# Altium PCB bob_breakout-layout.PcbDoc (part 2 of 2)
Units mil, origin at the board's own origin, x right, y up, seen from the top; angles counter-clockwise.
Board outline 5510 x 3935 mil, 2 copper layers (Top Layer, Bottom Layer); 95 components, 85 nets, 372 pads, 74 vias.
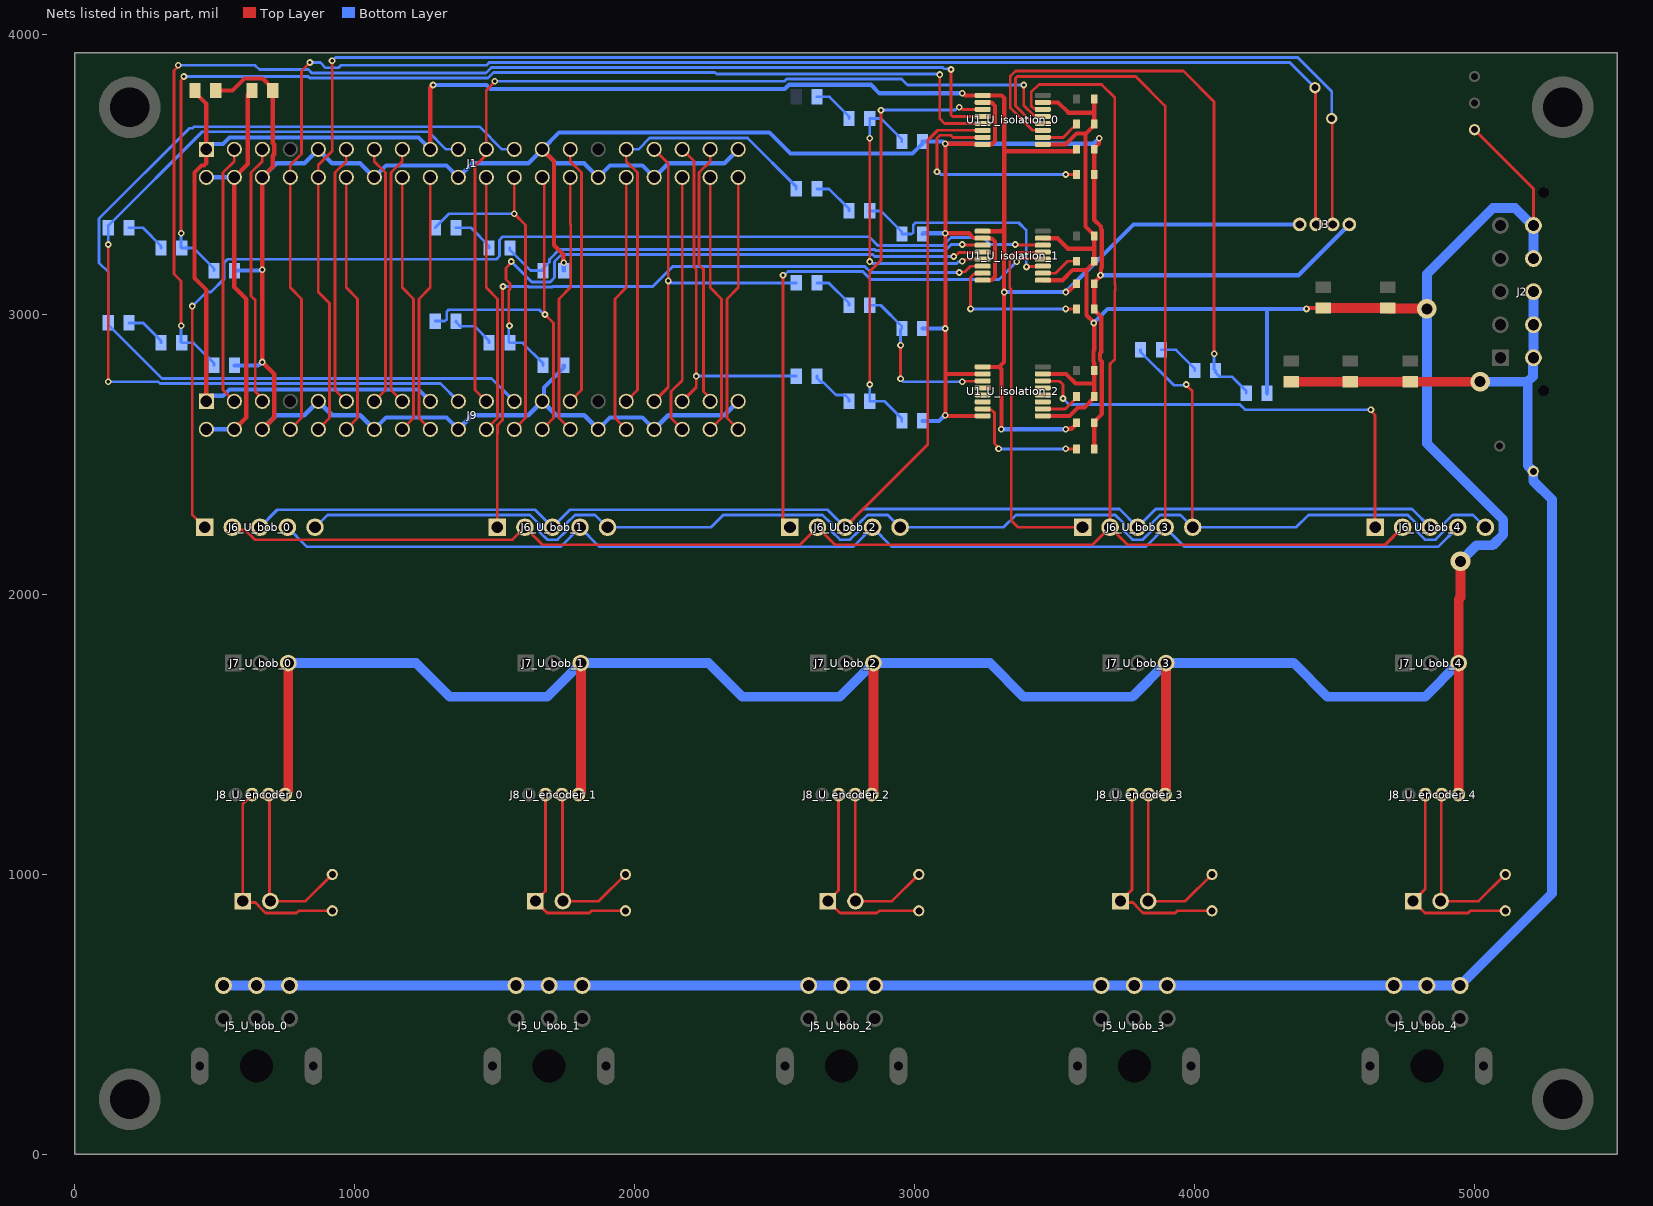
[diagram p2: the nets of this part, all layers, seen from the top]

## Via types
v1: diameter 24, hole 12, Top Layer to Bottom Layer, 70 vias
v2: diameter 70, hole 39.37, Top Layer to Bottom Layer, 4 vias

## Nets (pads, with @x,y where several pads share a name; then routed paths per layer and width w, separated by ;. In a path a pad name is that pad's centre, name@x,y a point inside that pad or via, vN(x,y) a via of type N, cw(c..) or ccw(c..) an arc to the next point about the centre after c; other vN are vias at no path point) (continued)
GND: C3.2 C4.2 C9_U_isolation_0.1 C9_U_isolation_1.1 C9_U_isolation_2.1 GND.1 J2.9 J2.10 J7_U_bob_0.3 J7_U_bob_1.3 J7_U_bob_2.3 J7_U_bob_3.3 J7_U_bob_4.3 J8_U_encoder_0.4 J8_U_encoder_1.4 J8_U_encoder_2.4 J8_U_encoder_3.4 J8_U_encoder_4.4 R2_U_isolation_0.2 R2_U_isolation_1.2 R2_U_isolation_2.2 R14_U_low-pass-filter_3.2 U1_U_isolation_0.9 U1_U_isolation_0.15 U1_U_isolation_1.9 U1_U_isolation_1.15 U1_U_isolation_2.9 U1_U_isolation_2.15 | length 13375.3
  Top Layer w10: GND.1@5000,3660 5210.63,3449.37 J2.10@5210.63,3317.96
  Top Layer w15: U1_U_isolation_2.9@3457.91,2637.5 3553.19,2637.5 3583.65,2667.96 3606.73,2667.96 3641.5,2702.73 R2_U_isolation_2.2@3641.5,2706.67 3641.5,2753.33 ; U1_U_isolation_2.15@3457.91,2787.5 3541.52,2787.5 3575.69,2753.33 3641.5,2753.33 ; U1_U_isolation_1.9@3457.91,3122.5 3528.45,3122.5 3564.7,3158.75 3614.18,3158.75 ; U1_U_isolation_1.15@3457.91,3272.5 3509.98,3272.5 3547.48,3235 3641.5,3235 ; U1_U_isolation_0.9@3457.91,3607.5 3539.07,3607.5 3577.92,3646.35 3609.28,3646.35 3610.53,3645.1 ; U1_U_isolation_0.15@3457.91,3757.5 3512.48,3757.5 3549.1,3720.88 3641.5,3720.88 ; v1@3640.5,2970.84 3614.18,2997.16 3614.18,3158.75 ; v1@3641.5,2969.84 3641.5,2872.91 3639.5,2870.92 3639.5,2829.08 3641.5,2827.09 C9_U_isolation_2.1@3641.5,2800 3641.5,2753.33 ; C9_U_isolation_0.1@3641.5,3770 3641.5,3720.88 ; v1(4400,3020) 4403,3023 C3.2@4460,3023 ; 3610.53,3645.1 3610.53,3314.9 3641.5,3283.94 3641.5,3235 ; 3610.53,3645.1 3637.18,3671.75 3637.18,3675.69 R2_U_isolation_0.2@3641.5,3680 3641.5,3720.88 ; 3614.18,3158.75 3641.5,3186.06 R2_U_isolation_1.2@3641.5,3190 3641.5,3235
  Top Layer w35: J8_U_encoder_0.4@751.53,1285 762.8,1296.26 J7_U_bob_0.3@762.8,1755 ; J8_U_encoder_1.4@1799.19,1285 1807.95,1293.76 J7_U_bob_1.3@1807.95,1755 ; J8_U_encoder_2.4@2846.85,1285 2853.11,1291.26 J7_U_bob_2.3@2853.11,1755 ; J8_U_encoder_3.4@3894.51,1285 3898.27,1288.76 J7_U_bob_3.3@3898.27,1755 ; C3.2@4460,3023 C4.2@4690,3023 4691.5,3021.5 4828.5,3021.5 v2(4830,3020) ; J8_U_encoder_4.4@4942.17,1285 4943.43,1286.26 J7_U_bob_4.3@4943.43,1755 4943.43,1983 4950,1989.57 v2(4950,2118)
  Bottom Layer w15: v1(3639.5,2969.84) 3689.66,3020 4258.5,3020 ; R14_U_low-pass-filter_3.2@4258.5,2718.88 4258.5,3020 ; v1(4400,3020) 4258.5,3020
  Bottom Layer w35: J7_U_bob_0.3@762.8,1755 1219.07,1755 1339.75,1634.31 1687.27,1634.31 J7_U_bob_1.3@1807.95,1755 2264.23,1755 2384.91,1634.31 2732.42,1634.31 J7_U_bob_2.3@2853.11,1755 3268.87,1755 3389.55,1634.31 3777.58,1634.31 J7_U_bob_3.3@3898.27,1755 4354.54,1755 4475.23,1634.31 4822.74,1634.31 J7_U_bob_4.3@4943.43,1755 ; v2(4950,2118) 5007.7,2175.7 5065.33,2175.7 5103,2213.37 5103,2266.63 4830,2539.63 v2(4830,3020) 4830,3144.42 5066.46,3380.88 5145.05,3380.88 5207.97,3317.96 J2.10@5210.63,3317.96 J2.9@5210.63,3199.85
GPIO_PE6: J1.33 J9.33 R12_U_low-pass-filter_8.2 | length 1401.8
  Top Layer w10: J9.33@2070,2690 2120,2740 v1(2120,3120) 2120,3540 J1.33@2070,3590
  Bottom Layer w10: v1(2120,3120) 2123.79,3120 2130.79,3113 R12_U_low-pass-filter_8.2@2577.5,3113
GPIO_PZ0: J1.31 J9.31 R12_U_low-pass-filter_7.2 | length 1636.6
  Top Layer w10: J9.31@1970,2690 2009.97,2729.97 2009.97,3506.56 1970,3546.52 J1.31@1970,3590
  Bottom Layer w10: J1.31@1970,3590 2013.48,3590 2053.44,3629.97 2403.78,3629.97 2577.5,3456.25 R12_U_low-pass-filter_7.2@2577.5,3448.75
I2C_1_SCL: J1.28 J9.28 | length 934.8
  Top Layer w10: J9.28@1770,2590 1730.03,2629.97 1730.03,3055.79 1772,3097.76 1772,3321.17 1770,3323.17 J1.28@1770,3490
I2C_1_SDA: J1.27 J9.27 | length 933.1
  Top Layer w10: J9.27@1770,2690 1809.97,2729.97 1809.97,3506.56 1770,3546.52 J1.27@1770,3590
I2C_2_SCL: J1.05 J9.05 | length 933.1
  Top Layer w10: J9.05@670,2690 670,2699.35 645,2724.35 645,3051.16 630.03,3066.13 630.03,3506.56 670,3546.52 J1.05@670,3590
I2C_2_SDA: J1.03 J9.03 | length 933.1
  Top Layer w10: J9.03@570,2690 530.03,2729.97 530.03,3506.56 570,3546.52 J1.03@570,3590
I2S_4_LRCK: J1.35 J9.35 R12_U_low-pass-filter_0.2 | length 1298.9
  Top Layer w10: J9.35@2170,2690 2220,2740 2220,3161.89 2212.03,3169.86 2212.03,3547.97 J1.35@2170,3590
  Bottom Layer w10: v1(2220,2780) R12_U_low-pass-filter_0.2@2577.5,2780
I2S_4_SCLK: J1.12 J9.12 | length 933.1
  Top Layer w10: J9.12@970,2590 1009.97,2629.97 1009.97,3055.79 970,3095.76 J1.12@970,3490
I2S_4_SDIN: J1.38 J9.38 | length 933.1
  Top Layer w10: J9.38@2270,2590 2309.97,2629.97 2309.97,3055.79 2270,3095.76 J1.38@2270,3490
I2S_4_SDOUT: J1.40 J9.40 | length 933.1
  Top Layer w10: J9.40@2370,2590 2330.03,2629.97 2330.03,3055.79 2370,3095.76 J1.40@2370,3490
JETSON_3V3: C2.1 C8_U_isolation_0.2 C8_U_isolation_1.2 C8_U_isolation_2.2 J1.01 J1.17 J3.1 J9.01 J9.17 U1_U_isolation_0.1 U1_U_isolation_1.1 U1_U_isolation_2.1 | length 8227
  Top Layer w15: C2.1@430,3800 430,3792.5 470,3752.5 J1.01@470,3590 470,3541.26 461.21,3532.47 452.41,3532.47 427.53,3507.59 427.53,3129.76 470,3087.3 J9.01@470,2690 ; J1.17@1270,3590 1270,3810 v1(1280,3820) ; v1(3170,3790) 3172.44,3790 3179.94,3782.5 U1_U_isolation_0.1@3243.35,3782.5 3311.21,3782.5 3320,3773.71 3320,3584.76 ; U1_U_isolation_2.1@3243.35,2812.5 3301.6,2812.5 ; U1_U_isolation_1.1@3243.35,3297.5 3311.21,3297.5 3320,3306.29 ; v1(3310,2590) 3310,2804.1 3301.6,2812.5 ; v1(3540,2590) 3541.72,2591.72 3560.83,2591.72 3578.5,2609.4 C8_U_isolation_2.2@3578.5,2613.33 ; v1(3540,3080) 3548.5,3080 C8_U_isolation_1.2@3578.5,3110 ; C8_U_isolation_0.2@3578.5,3590 3578.5,3587.45 3574.19,3583.14 3321.62,3583.14 3320,3584.76 ; 3301.6,2812.5 3319.5,2830.4 3319.5,3207.86 3320,3208.36 3320,3306.29 ; 3320,3306.29 3320,3584.76
  Bottom Layer w15: J9.01@470,2690 489.47,2709.47 529.41,2709.47 552.41,2732.47 1227.53,2732.47 J9.17@1270,2690 ; J1.01@470,3590 489.47,3609.47 529.41,3609.47 552.41,3632.47 1227.53,3632.47 J1.17@1270,3590 ; v1(1280,3820) 1471.11,3820 1485.5,3805.61 2536.19,3805.61 2551.08,3820.5 2844.07,3820.5 2874.57,3790 v1(3170,3790) ; v1(3310,2590) v1(3540,2590) ; v1(3320,3080) v1(3540,3080) 3781.74,3321.74 J3.1@4375.63,3321.74
JETSON_5V: C1.1 J1.02 J1.04 J9.02 J9.04 | length 1471.3
  Top Layer w15: J9.04@570,2590 612.47,2632.47 612.47,3054.7 570,3097.17 J1.04@570,3490 618,3538 618,3785 C1.1@633,3800
  Bottom Layer w15: J9.02@470,2590 J9.04@570,2590 ; J1.02@470,3490 J1.04@570,3490
JETSON_GND: C1.2 C2.2 C8_U_isolation_0.1 C8_U_isolation_1.1 C8_U_isolation_2.1 J1.06 J1.09 J1.14 J1.20 J1.25 J1.30 J1.34 J1.39 J3.4 J9.06 J9.09 J9.14 J9.20 J9.25 J9.30 J9.34 J9.39 R1_U_isolation_0.2 R1_U_isolation_1.2 R1_U_isolation_2.2 R14_U_low-pass-filter_0.2 R14_U_low-pass-filter_1.2 R14_U_low-pass-filter_2.2 R14_U_low-pass-filter_4.2 R14_U_low-pass-filter_5.2 R14_U_low-pass-filter_6.2 R14_U_low-pass-filter_7.2 R14_U_low-pass-filter_8.2 U1_U_isolation_0.2 U1_U_isolation_0.8 U1_U_isolation_1.2 U1_U_isolation_1.8 U1_U_isolation_2.2 U1_U_isolation_2.8 | length 12717.3
  Top Layer w15: C2.2@504,3800 563.58,3800 606.58,3843 671.5,3843 707,3807.5 C1.2@707,3800 707,3613.06 712.47,3607.59 712.47,3572.41 707,3566.94 707,3527 J1.06@670,3490 v1(670,3160) v1(670,2830) 712.47,2787.53 712.47,2632.47 J9.06@670,2590 ; J1.25@1670,3590 1712.47,3547.53 1712.47,3247.53 1745.28,3214.72 1745.28,3186.72 v1(1747,3185) ; 3110,2790 3112.5,2787.5 U1_U_isolation_2.2@3243.35,2787.5 ; U1_U_isolation_2.8@3243.35,2637.5 3114.94,2637.5 3112.44,2640 v1(3110,2640) v1(3110,2950) v1(3110,3290) ; U1_U_isolation_1.8@3243.35,3122.5 3243.99,3123.14 3275.72,3123.14 3287.39,3134.82 3287.39,3260.18 3275.72,3271.86 3243.99,3271.86 U1_U_isolation_1.2@3243.35,3272.5 3242.71,3273.14 3210.98,3273.14 3194.12,3290 v1(3110,3290) ; U1_U_isolation_0.2@3243.35,3757.5 3243.99,3756.86 3275.72,3756.86 3287.39,3745.18 3287.39,3619.82 3275.72,3608.14 3210.98,3608.14 3209.12,3610 v1(3110,3610) v1(3110,3290) ; R1_U_isolation_2.2@3641.5,2520 C8_U_isolation_2.1@3641.5,2613.33 3645.81,2617.64 3645.81,2621.58 3668.81,2644.58 3668.81,2832.3 3662.5,2838.61 3662.5,2861.39 3667,2865.89 3667,2990.56 3645.81,3011.75 3645.81,3015.69 R1_U_isolation_1.2@3641.5,3020 3641.5,3113.94 3662.59,3135.03 3662.59,3138.28 3666.03,3141.72 3666.03,3165.05 3668.81,3167.83 3668.81,3302.17 3666.03,3304.95 3666.03,3313.97 3641.5,3338.5 R1_U_isolation_0.2@3641.5,3500 C8_U_isolation_0.1@3641.5,3590 3641.5,3593.94 3658.28,3610.72 3658.28,3628.28 v1(3660,3630)
  Bottom Layer w15: R14_U_low-pass-filter_1.2@571,2818.12 655.69,2818.12 667.56,2830 v1(670,2830) ; R14_U_low-pass-filter_2.2@571,3156.75 666.75,3156.75 v1(670,3160) ; J9.06@670,2590 720,2640 820,2640 J9.09@870,2690 920,2640 1020,2640 J9.14@1070,2590 1112.47,2632.47 1327.53,2632.47 J9.20@1370,2590 1420,2640 1620,2640 J9.25@1670,2690 ; J1.06@670,3490 720,3540 820,3540 J1.09@870,3590 920,3540 1020,3540 J1.14@1070,3490 1112.47,3532.47 1327.53,3532.47 J1.20@1370,3490 1420,3540 1620,3540 J1.25@1670,3590 ; R14_U_low-pass-filter_5.2@1747,2818.12 1747,2810.62 1675.84,2739.47 1675.84,2695.84 J9.25@1670,2690 ; R14_U_low-pass-filter_4.2@1747,3156.75 v1(1747,3185) ; J9.39@2370,2690 2320,2640 2120,2640 J9.34@2070,2590 2027.53,2632.47 1912.47,2632.47 J9.30@1870,2590 1820,2640 1720,2640 J9.25@1670,2690 ; J1.39@2370,3590 2320,3540 2120,3540 J1.34@2070,3490 2027.53,3532.47 1912.47,3532.47 J1.30@1870,3490 1820,3540 1720,3540 J1.25@1670,3590 ; R14_U_low-pass-filter_0.2@3028.5,2620 3087.56,2620 3107.56,2640 v1(3110,2640) ; R14_U_low-pass-filter_8.2@3028.5,2950 v1(3110,2950) ; R14_U_low-pass-filter_7.2@3028.5,3287.38 3031.12,3290 v1(3110,3290) ; v1(3660,3630) 3640,3610 v1(3110,3610) 3107.56,3610 3099.81,3617.75 R14_U_low-pass-filter_6.2@3028.5,3617.75 3028.5,3610.25 2993,3574.75 2556.84,3574.75 2481.12,3650.47 1730.47,3650.47 J1.25@1670,3590 ; v1(3664.31,3140) 4371.06,3140 J3.4@4552.8,3321.74
LCD_BL_PWM: J1.32 J9.32 | length 933.1
  Top Layer w10: J9.32@1970,2590 1930.03,2629.97 1930.03,3055.79 1970,3095.76 J1.32@1970,3490
LCD_TE: J1.15 J9.15 | length 933.1
  Top Layer w10: J9.15@1170,2690 1130.03,2729.97 1130.03,3506.56 1170,3546.52 J1.15@1170,3590
NetENC_A_U_encoder_0_1: ENC_A_U_encoder_0.1 J4_U_bob_0.1 J8_U_encoder_0.2 | length 736.8
  Top Layer w10: J8_U_encoder_0.2@633.42,1285 600.16,1251.73 J4_U_bob_0.1@600.16,904.33 604.49,900 644.84,900 655.9,888.95 655.9,886.65 680.9,861.64 792.21,861.64 800.57,870 ENC_A_U_encoder_0.1@920,870
NetENC_A_U_encoder_1_1: ENC_A_U_encoder_1.1 J4_U_bob_1.1 J8_U_encoder_1.2 | length 738.8
  Top Layer w10: J8_U_encoder_1.2@1681.08,1285 1681.08,940.1 J4_U_bob_1.1@1645.31,904.33 1688,861.64 1838.54,861.64 1846.9,870 ENC_A_U_encoder_1.1@1967.5,870
NetENC_A_U_encoder_2_1: ENC_A_U_encoder_2.1 J4_U_bob_2.1 J8_U_encoder_2.2 | length 742.2
  Top Layer w10: J8_U_encoder_2.2@2728.74,1285 2728.74,942.6 J4_U_bob_2.1@2690.47,904.33 2733.16,861.64 2865.84,861.64 2874.2,870 ENC_A_U_encoder_2.1@3015,870
NetENC_A_U_encoder_3_1: ENC_A_U_encoder_3.1 J4_U_bob_3.1 J8_U_encoder_3.2 | length 746.9
  Top Layer w10: J8_U_encoder_3.2@3776.4,1285 3776.4,945.1 J4_U_bob_3.1@3735.63,904.33 3739.96,900 3780.32,900 3791.37,888.95 3791.37,886.65 3816.37,861.64 3931.2,861.64 3939.56,870 ENC_A_U_encoder_3.1@4062.5,870
NetENC_A_U_encoder_4_1: ENC_A_U_encoder_4.1 J4_U_bob_4.1 J8_U_encoder_4.2 | length 748.9
  Top Layer w10: J8_U_encoder_4.2@4824.06,1285 4824.06,947.6 J4_U_bob_4.1@4780.79,904.33 4823.47,861.64 4977.53,861.64 4985.88,870 ENC_A_U_encoder_4.1@5110,870
NetENC_B_U_encoder_0_1: ENC_B_U_encoder_0.1 J4_U_bob_0.2 J8_U_encoder_0.3 | length 644.2
  Top Layer w10: J8_U_encoder_0.3@692.48,1285 695.53,1281.95 695.53,907.38 J4_U_bob_0.2@698.58,904.33 824.33,904.33 ENC_B_U_encoder_0.1@920,1000
NetENC_B_U_encoder_1_1: ENC_B_U_encoder_1.1 J4_U_bob_1.2 J8_U_encoder_1.3 | length 645.5
  Top Layer w10: J8_U_encoder_1.3@1740.14,1285 1741.94,1283.2 1741.94,906.13 J4_U_bob_1.2@1743.74,904.33 1871.83,904.33 ENC_B_U_encoder_1.1@1967.5,1000
NetENC_B_U_encoder_2_1: ENC_B_U_encoder_2.1 J4_U_bob_2.2 J8_U_encoder_2.3 | length 646.9
  Top Layer w10: J8_U_encoder_2.3@2787.8,1285 2788.35,1284.45 2788.35,904.88 J4_U_bob_2.2@2788.9,904.33 2919.33,904.33 ENC_B_U_encoder_2.1@3015,1000
NetENC_B_U_encoder_3_1: ENC_B_U_encoder_3.1 J4_U_bob_3.2 J8_U_encoder_3.3 | length 649.3
  Top Layer w10: J8_U_encoder_3.3@3835.45,1285 3834.75,1284.3 3834.75,905.03 J4_U_bob_3.2@3834.05,904.33 3966.83,904.33 ENC_B_U_encoder_3.1@4062.5,1000
NetENC_B_U_encoder_4_1: ENC_B_U_encoder_4.1 J4_U_bob_4.2 J8_U_encoder_4.3 | length 652.7
  Top Layer w10: J8_U_encoder_4.3@4883.11,1285 4881.16,1283.05 4881.16,906.28 J4_U_bob_4.2@4879.21,904.33 5014.33,904.33 ENC_B_U_encoder_4.1@5110,1000
NetR1_U_isolation_0_1: R1_U_isolation_0.1 U1_U_isolation_0.7 | length 793.2
  Top Layer w10: v1(3080,3510) 3080,3630 3090,3640 3130,3640 3137.5,3632.5 U1_U_isolation_0.7@3243.35,3632.5 ; v1(3540,3500) R1_U_isolation_0.1@3578.5,3500
  Bottom Layer w10: v1(3080,3510) 3083.79,3510 3093.79,3500 v1(3540,3500)
NetR1_U_isolation_1_1: R1_U_isolation_1.1 U1_U_isolation_1.7 | length 540.5
  Top Layer w10: v1(3200,3020) 3200,3132.34 3212.01,3144.36 3240.21,3144.36 U1_U_isolation_1.7@3243.35,3147.5 ; v1(3540,3020) R1_U_isolation_1.1@3578.5,3020
  Bottom Layer w10: v1(3200,3020) v1(3540,3020)
NetR1_U_isolation_2_1: R1_U_isolation_2.1 U1_U_isolation_2.7 | length 461
  Top Layer w10: U1_U_isolation_2.7@3243.35,2662.5 3246.49,2659.36 3274.68,2659.36 3285,2649.04 3285,2538.79 3300,2523.79 v1(3300,2520) ; v1(3540,2520) R1_U_isolation_2.1@3578.5,2520
  Bottom Layer w10: v1(3300,2520) v1(3540,2520)
NetR2_U_isolation_0_1: R2_U_isolation_0.1 U1_U_isolation_0.10 | length 142.6
  Top Layer w10: U1_U_isolation_0.10@3457.91,3632.5 3531,3632.5 3567.76,3669.25 3571.69,3669.25 3578.5,3676.06 R2_U_isolation_0.1@3578.5,3680
NetR2_U_isolation_1_1: R2_U_isolation_1.1 U1_U_isolation_1.10 | length 138.2
  Top Layer w10: U1_U_isolation_1.10@3457.91,3147.5 3503.75,3147.5 3546.25,3190 R2_U_isolation_1.1@3578.5,3190
NetR2_U_isolation_2_1: R2_U_isolation_2.1 U1_U_isolation_2.10 | length 141.2
  Top Layer w10: U1_U_isolation_2.10@3457.91,2662.5 3538.27,2662.5 3578.5,2702.73 R2_U_isolation_2.1@3578.5,2706.67
NetR12_U_low-pass-filter_0_1: R12_U_low-pass-filter_0.1 R13_U_low-pass-filter_0.2 | length 160.6
  Bottom Layer w10: R12_U_low-pass-filter_0.1@2651.5,2780 2651.5,2772.5 2666.5,2757.5 2674,2757.5 2719,2712.5 2751,2712.5 2766,2697.5 R13_U_low-pass-filter_0.2@2766,2690
NetR12_U_low-pass-filter_1_1: R12_U_low-pass-filter_1.1 R13_U_low-pass-filter_1.2 | length 148.4
  Bottom Layer w10: R12_U_low-pass-filter_1.1@194,2970 244.75,2970 308.5,2906.25 R13_U_low-pass-filter_1.2@308.5,2898.75
NetR12_U_low-pass-filter_2_1: R12_U_low-pass-filter_2.1 R13_U_low-pass-filter_2.2 | length 148.9
  Bottom Layer w10: R12_U_low-pass-filter_2.1@194,3310 243.5,3310 308.5,3245 R13_U_low-pass-filter_2.2@308.5,3237.5
NetR12_U_low-pass-filter_3_1: R12_U_low-pass-filter_3.1 R13_U_low-pass-filter_3.2 | length 153.9
  Bottom Layer w10: R12_U_low-pass-filter_3.1@3881.5,2873.75 3934.25,2873.75 4000.5,2807.5 R13_U_low-pass-filter_3.2@4000.5,2800
NetR12_U_low-pass-filter_4_1: R12_U_low-pass-filter_4.1 R13_U_low-pass-filter_4.2 | length 153.2
  Bottom Layer w10: R12_U_low-pass-filter_4.1@1361.5,3310 1415.25,3310 1480.25,3245 R13_U_low-pass-filter_4.2@1480.25,3237.5
NetR12_U_low-pass-filter_5_1: R12_U_low-pass-filter_5.1 R13_U_low-pass-filter_5.2 | length 157
  Bottom Layer w10: R12_U_low-pass-filter_5.1@1361.5,2976.25 1361.5,2973.25 1376.5,2958.25 1428.25,2958.25 1480.25,2906.25 R13_U_low-pass-filter_5.2@1480.25,2898.75
NetR12_U_low-pass-filter_6_1: R12_U_low-pass-filter_6.1 R13_U_low-pass-filter_6.2 | length 151
  Bottom Layer w10: R12_U_low-pass-filter_6.1@2651.5,3777.5 2696,3777.5 2766,3707.5 R13_U_low-pass-filter_6.2@2766,3700
NetR12_U_low-pass-filter_7_1: R12_U_low-pass-filter_7.1 R13_U_low-pass-filter_7.2 | length 151.5
  Bottom Layer w10: R12_U_low-pass-filter_7.1@2651.5,3448.75 2694.75,3448.75 2766,3377.5 R13_U_low-pass-filter_7.2@2766,3370
NetR12_U_low-pass-filter_8_1: R12_U_low-pass-filter_8.1 R13_U_low-pass-filter_8.2 | length 152
  Bottom Layer w10: R12_U_low-pass-filter_8.1@2651.5,3113 2693.5,3113 2766,3040.5 R13_U_low-pass-filter_8.2@2766,3033
NetU1_U_isolation_2_4: U1_U_isolation_2.4
NetU1_U_isolation_2_5: U1_U_isolation_2.5
NetU1_U_isolation_2_6: U1_U_isolation_2.6
NetU1_U_isolation_2_11: U1_U_isolation_2.11
NetU1_U_isolation_2_12: U1_U_isolation_2.12
NetU1_U_isolation_2_13: U1_U_isolation_2.13
PGND: C5.2 C6.2 C7.2 J2.6 J2.7 J2.8 J5_U_bob_0.4 J5_U_bob_0.5 J5_U_bob_0.6 J5_U_bob_1.4 J5_U_bob_1.5 J5_U_bob_1.6 J5_U_bob_2.4 J5_U_bob_2.5 J5_U_bob_2.6 J5_U_bob_3.4 J5_U_bob_3.5 J5_U_bob_3.6 J5_U_bob_4.4 J5_U_bob_4.5 J5_U_bob_4.6 PGND.1 | length 7924.4
  Top Layer w35: C7.2@4345.63,2759.74 C6.2@4555.63,2759.74 C5.2@4770.63,2759.74 4770.76,2759.87 5019.87,2759.87 v2(5020,2760)
  Bottom Layer w35: J5_U_bob_0.6@531.26,603.19 J5_U_bob_0.5@649.37,603.19 J5_U_bob_0.4@767.48,603.19 J5_U_bob_1.6@1576.42,603.19 J5_U_bob_1.5@1694.53,603.19 J5_U_bob_1.4@1812.64,603.19 J5_U_bob_2.6@2621.57,603.19 J5_U_bob_2.5@2739.68,603.19 J5_U_bob_2.4@2857.8,603.19 J5_U_bob_3.6@3666.73,603.19 J5_U_bob_3.5@3784.84,603.19 J5_U_bob_3.4@3902.95,603.19 J5_U_bob_4.6@4711.89,603.19 J5_U_bob_4.5@4830,603.19 J5_U_bob_4.4@4948.11,603.19 5277,932.08 5277,2338.71 5210,2405.71 PGND.1@5210,2440 5190,2460 5190,2760 5208.75,2778.75 5208.75,2843.64 J2.6@5210.63,2845.52 J2.7@5210.63,2963.63 J2.8@5210.63,3081.74 ; v2(5020,2760) 5181.02,2760 5190,2751.02
SPI_1_CS0: J1.24 J9.24 R12_U_low-pass-filter_4.2 | length 1236.3
  Top Layer w10: J9.24@1570,2590 1609.97,2629.97 1609.97,3320.03 v1(1570,3360) J1.24@1570,3490
  Bottom Layer w10: R12_U_low-pass-filter_4.2@1287.5,3310 1337.5,3360 v1(1570,3360)
SPI_1_CS0_FILTER: R13_U_low-pass-filter_4.1 R14_U_low-pass-filter_4.1 U1_U_isolation_1.3 | length 1779.3
  Top Layer w10: v1(3170,3250) 3171.25,3248.75 3242.1,3248.75 U1_U_isolation_1.3@3243.35,3247.5
  Bottom Layer w10: R13_U_low-pass-filter_4.1@1554.25,3237.5 1554.25,3230 1627.5,3156.75 R14_U_low-pass-filter_4.1@1673,3156.75 1673,3164.25 1696,3187.25 1696,3197.09 1730.91,3232 2857.81,3232 2860.94,3228.88 3109.69,3228.88 3130.81,3250 v1(3170,3250)
SPI_1_CS0_ISO: J6_U_bob_0.1 U1_U_isolation_1.14 | length 4052.8
  Top Layer w10: v1(420,3030) 420,2284.37 J6_U_bob_0.1@464.37,2240 ; v1(3360,3250) 3361.25,3248.75 3456.66,3248.75 U1_U_isolation_1.14@3457.91,3247.5
  Bottom Layer w10: v1(420,3030) 470.27,3080.27 486.41,3080.27 534,3127.87 534,3185.63 545.62,3197.25 1025.5,3197.25 1025.75,3197 1505.63,3197 1517.25,3208.62 1517.25,3266.38 1528.87,3278 2837.27,3278 2868.39,3246.88 3102.23,3246.88 3130.36,3275 3245.43,3275 3270.43,3250 v1(3360,3250)
SPI_1_CS1: J1.26 J9.26 R12_U_low-pass-filter_5.2 | length 1365.1
  Top Layer w10: J9.26@1670,2590 1709.97,2629.97 1709.97,2970.03 v1(1680,3000) 1677.32,3002.68 1677.32,3482.68 J1.26@1670,3490
  Bottom Layer w10: R12_U_low-pass-filter_5.2@1287.5,2976.25 1322.5,2976.25 1328.5,2982.25 1328.5,3009.13 1336.12,3016.75 1659.46,3016.75 1676.21,3000 v1(1680,3000)
SPI_1_CS1_FILTER: R13_U_low-pass-filter_5.1 R14_U_low-pass-filter_5.1 U1_U_isolation_1.4 | length 2269.1
  Top Layer w10: v1(1552.97,2960) 1550,2960 1550,3084.64 1555,3089.64 1555,3110.36 1540,3125.36 1540,3166.21 1559.45,3185.66 v1(1559.45,3189.45) ; v1(3140,3207) 3143.79,3207 3158.04,3221.25 3242.1,3221.25 U1_U_isolation_1.4@3243.35,3222.5
  Bottom Layer w10: v1(1552.97,2960) 1550,2960 1550,2903 R13_U_low-pass-filter_5.1@1554.25,2898.75 1599.88,2898.75 1673,2825.62 R14_U_low-pass-filter_5.1@1673,2818.12 ; v1(1559.45,3189.45) 1632.64,3116.25 1698.38,3116.25 1714,3131.87 1714,3189.63 1738.37,3214 2850.36,3214 2857.36,3207 v1(3140,3207)
SPI_1_CS1_ISO: J6_U_bob_1.1 U1_U_isolation_1.6 | length 2631.1
  Top Layer w10: J6_U_bob_1.1@1509.53,2240 1509.53,2573 1509.97,2573.44 1509.97,2604.51 1527.97,2622.51 1527.97,3097.97 v1(1530,3100) ; v1(3160,3150) 3162.68,3152.68 3179.98,3152.68 3199.8,3172.5 U1_U_isolation_1.6@3243.35,3172.5
  Bottom Layer w10: v1(1530,3100) 1620.28,3100 1622.03,3098.25 1705.84,3098.25 1707.59,3100 2064.64,3100 2136.14,3171.5 2822.14,3171.5 2843.64,3150 v1(3160,3150)
SPI_1_CS2_FILTER: R13_U_low-pass-filter_6.1 R14_U_low-pass-filter_6.1 U1_U_isolation_1.5 | length 1076.6
  Top Layer w10: v1(2840,3189) v1(2840,3630) ; v1(3170,3190) 3173.79,3190 3181.29,3197.5 U1_U_isolation_1.5@3243.35,3197.5
  Bottom Layer w10: v1(2840,3189) 2843.79,3189 2850.79,3182 3150.36,3182 3155.68,3187.32 3167.32,3187.32 v1(3170,3190) ; v1(2840,3630) R13_U_low-pass-filter_6.1@2840,3700 2879.75,3700 2954.5,3625.25 R14_U_low-pass-filter_6.1@2954.5,3617.75
SPI_1_CS2_ISO: J6_U_bob_2.1 U1_U_isolation_1.12 | length 1888.1
  Top Layer w10: v1(2530,3140) 2530,2264.69 J6_U_bob_2.1@2554.69,2240 ; v1(3365,3189.01) 3366.35,3189.01 3377.86,3200.52 3454.89,3200.52 U1_U_isolation_1.12@3457.91,3197.5
  Bottom Layer w10: v1(2530,3140) 2533.79,3140 2547.29,3153.5 2814.69,3153.5 2843.19,3125 3300.99,3125 v1(3365,3189.01)
SPI_1_CS3_FILTER: R13_U_low-pass-filter_7.1 R14_U_low-pass-filter_7.1 U1_U_isolation_1.11 | length 831.6
  Top Layer w10: v1(3400,3170) 3401.25,3171.25 3456.66,3171.25 U1_U_isolation_1.11@3457.91,3172.5
  Bottom Layer w10: R13_U_low-pass-filter_7.1@2840,3370 2879.38,3370 2954.5,3294.88 R14_U_low-pass-filter_7.1@2954.5,3287.38 2989.5,3287.38 2995.5,3293.38 2995.5,3320.26 3003.12,3327.88 3372.12,3327.88 3398.57,3301.43 3398.57,3171.43 v1(3400,3170)
SPI_1_CS3_ISO: J6_U_bob_3.1 U1_U_isolation_1.13 | length 1329.1
  Top Layer w10: U1_U_isolation_1.13@3457.91,3222.5 3363.13,3222.5 3340,3199.37 3340,3095.36 3345,3090.36 3345,2265 3370,2240 J6_U_bob_3.1@3599.84,2240
SPI_1_CS4_FILTER: R13_U_low-pass-filter_8.1 R14_U_low-pass-filter_8.1 U1_U_isolation_2.3 | length 633.7
  Top Layer w10: v1(2950,2770) v1(2950,2890) ; v1(3170,2760) 3171.25,2761.25 3242.1,2761.25 U1_U_isolation_2.3@3243.35,2762.5
  Bottom Layer w10: R13_U_low-pass-filter_8.1@2840,3033 2879,3033 2954.5,2957.5 R14_U_low-pass-filter_8.1@2954.5,2950 2950,2945.5 v1(2950,2890) ; v1(2950,2770) 2960,2760 v1(3170,2760)
SPI_1_CS4_ISO: J6_U_bob_4.1 U1_U_isolation_2.14 | length 1670
  Top Layer w10: U1_U_isolation_2.14@3457.91,2762.5 3459.16,2761.25 3518.75,2761.25 3530,2750 v1(3530,2700) ; v1(4630,2660) 4630,2656.21 4645,2641.21 J6_U_bob_4.1@4645,2240
  Bottom Layer w10: v1(3530,2700) 3551.62,2678.38 4161.63,2678.38 4180,2660 v1(4630,2660)
SPI_1_CS5_FILTER: R13_U_low-pass-filter_0.1 R14_U_low-pass-filter_0.1 U1_U_isolation_0.3 | length 1575.1
  Top Layer w10: v1(2840,2750) 2840,3153.64 2880,3193.64 v1(2880,3730) ; v1(3160,3740) 3163.79,3740 3171.29,3732.5 U1_U_isolation_0.3@3243.35,3732.5
  Bottom Layer w10: v1(2840,2750) R13_U_low-pass-filter_0.1@2840,2690 2892,2690 2954.5,2627.5 R14_U_low-pass-filter_0.1@2954.5,2620 ; v1(2880,3730) 3146.21,3730 3156.21,3740 v1(3160,3740)
SPI_1_CS5_ISO: J6_U_bob_0.2 J6_U_bob_1.2 J6_U_bob_2.2 J6_U_bob_3.2 J6_U_bob_4.2 U1_U_isolation_0.14 | length 6341.6
  Top Layer w10: J6_U_bob_0.2@562.8,2240 572.86,2229.94 608.64,2229.94 642.87,2195.7 1563.65,2195.7 J6_U_bob_1.2@1607.95,2240 1670.25,2177.7 2590.81,2177.7 J6_U_bob_2.2@2653.11,2240 2715.41,2177.7 3635.97,2177.7 J6_U_bob_3.2@3698.27,2240 ; U1_U_isolation_0.14@3457.91,3732.5 3454.77,3735.64 3426.58,3735.64 3416.37,3745.85 3416.37,3794.15 3443.97,3821.75 3668.22,3821.75 3715,3774.97 3715,3109.13 3716.81,3107.32 3716.81,3086.61 3715,3084.8 3715,2839.64 3700.36,2825 3698.27,2825 J6_U_bob_3.2@3698.27,2240 ; J6_U_bob_4.2@4743.43,2240 4681.13,2177.7 3760.57,2177.7 J6_U_bob_3.2@3698.27,2240
SPI_1_MISO: J1.21 J9.21 U1_U_isolation_0.13 | length 3248
  Top Layer w10: J9.21@1470,2690 1430.03,2729.97 1430.03,3530.03 1461.59,3561.59 1461.59,3581.59 J1.21@1470,3590 1470,3800 1500,3830 v1(1500,3833.11) ; v1(3390,3820) 3390,3746.77 3426.12,3710.64 3454.77,3710.64 U1_U_isolation_0.13@3457.91,3707.5
  Bottom Layer w10: v1(1500,3833.11) 2534.69,3833.11 2542.59,3841 2953.9,3841 2974.9,3820 v1(3390,3820)
SPI_1_MISO_FILTER: R13_U_low-pass-filter_3.1 R14_U_low-pass-filter_3.1 U1_U_isolation_0.11 | length 2158.3
  Top Layer w10: U1_U_isolation_0.11@3457.91,3657.5 3457.61,3657.8 3422.2,3657.8 3342,3738 3342,3851.6 3360.4,3870 3960,3870 4070,3760 v1(4070,2860)
  Bottom Layer w10: v1(4070,2860) 4070,2804.5 R13_U_low-pass-filter_3.1@4074.5,2800 4074.5,2792.5 4089.5,2777.5 4133.38,2777.5 4184.5,2726.38 R14_U_low-pass-filter_3.1@4184.5,2718.88
SPI_1_MISO_ISO: J6_U_bob_0.5 J6_U_bob_1.5 J6_U_bob_2.5 J6_U_bob_3.5 J6_U_bob_4.5 R12_U_low-pass-filter_3.2 | length 5487.1
  Top Layer w10: v1(3970,2750) 3970,2748.29 3991.77,2726.52 3991.77,2241.77 J6_U_bob_3.5@3993.54,2240
  Bottom Layer w10: J6_U_bob_0.5@858.07,2240 902.37,2284.3 1626.3,2284.3 1662.08,2248.52 1662.08,2221.65 1688.03,2195.7 1724.73,2195.7 1755.59,2226.56 1755.59,2253.44 1786.45,2284.3 1858.93,2284.3 J6_U_bob_1.5@1903.23,2240 2272.31,2240 2316.61,2284.3 2671.46,2284.3 2702.32,2253.44 2702.32,2226.56 2733.19,2195.7 2769.89,2195.7 2800.75,2226.56 2800.75,2253.44 2831.61,2284.3 2904.09,2284.3 J6_U_bob_2.5@2948.39,2240 3317.47,2240 3361.77,2284.3 3716.62,2284.3 3747.48,2253.44 3747.48,2226.56 3778.34,2195.7 3815.04,2195.7 3845.91,2226.56 3845.91,2253.44 3876.77,2284.3 3949.25,2284.3 J6_U_bob_3.5@3993.54,2240 4362.63,2240 4406.93,2284.3 4761.78,2284.3 4792.64,2253.44 4792.64,2226.56 4823.5,2195.7 4860.2,2195.7 4891.06,2226.56 4891.06,2253.44 4921.93,2284.3 4994.4,2284.3 J6_U_bob_4.5@5038.7,2240 ; R12_U_low-pass-filter_3.2@3807.5,2873.75 3807.5,2866.25 3926.43,2747.32 3967.32,2747.32 v1(3970,2750)
SPI_1_MOSI: J1.19 J9.19 R12_U_low-pass-filter_2.2 | length 3251.5
  Top Layer w10: v1(120,2760) v1(120,3250)
  Bottom Layer w10: v1(120,2760) 297.04,2760 304.08,2752.97 1307.03,2752.97 J9.19@1370,2690 ; v1(120,3250) R12_U_low-pass-filter_2.2@120,3310 120,3317.5 455.47,3652.97 1263.56,3652.97 1326.52,3590 J1.19@1370,3590
SPI_1_MOSI_FILTER: R13_U_low-pass-filter_2.1 R14_U_low-pass-filter_2.1 U1_U_isolation_0.5 | length 3800.4
  Top Layer w10: v1(380,3290) 380,3836.21 390,3846.21 v1(390,3850) ; v1(3090,3857) 3090,3700 3107.5,3682.5 U1_U_isolation_0.5@3243.35,3682.5
  Bottom Layer w10: v1(380,3290) 380,3240 R13_U_low-pass-filter_2.1@382.5,3237.5 423.75,3237.5 497,3164.25 R14_U_low-pass-filter_2.1@497,3156.75 ; v1(390,3850) 834.24,3850 839.17,3845.07 1476.61,3845.07 1495.54,3864 2287.38,3864 2292.38,3859 3088,3859 v1(3090,3857)
SPI_1_MOSI_ISO: J6_U_bob_0.4 J6_U_bob_1.4 J6_U_bob_2.4 J6_U_bob_3.4 J6_U_bob_4.4 U1_U_isolation_0.12 | length 6732.5
  Top Layer w10: U1_U_isolation_0.12@3457.91,3682.5 3454.77,3685.64 3419.81,3685.64 3360,3745.46 3360,3844.14 3365.86,3850 3790,3850 3895.12,3744.88 J6_U_bob_3.4@3895.12,2240
  Bottom Layer w10: J6_U_bob_0.4@759.65,2240 829.65,2170 1734.8,2170 J6_U_bob_1.4@1804.8,2240 1874.8,2170 2779.96,2170 J6_U_bob_2.4@2849.96,2240 ; J6_U_bob_2.4@2842,2247.96 J6_U_bob_2.4@2849.96,2240 ; J6_U_bob_4.4@4940.28,2240 4870.28,2170 3965.12,2170 J6_U_bob_3.4@3895.12,2240 3825.12,2170 2919.96,2170 J6_U_bob_2.4@2849.96,2240
SPI_1_SCK: J1.23 J9.23 R12_U_low-pass-filter_1.2 | length 3609.4
  Bottom Layer w10: J9.23@1570,2690 1489.03,2770.97 311.53,2770.97 120,2962.5 R12_U_low-pass-filter_1.2@120,2970 120,3151.19 87,3184.19 87,3342.88 409.12,3665 420.36,3665 426.32,3670.97 1445.56,3670.97 1526.52,3590 J1.23@1570,3590
SPI_1_SCK_FILTER: R13_U_low-pass-filter_1.1 R14_U_low-pass-filter_1.1 U1_U_isolation_0.4 | length 4220.5
  Top Layer w10: v1(370,3890) 370,3886.21 355,3871.21 355,3144.57 380,3119.57 v1(380,2960) ; v1(3130,3875) 3130,3713.36 3135.86,3707.5 U1_U_isolation_0.4@3243.35,3707.5
  Bottom Layer w10: v1(370,3890) 644.57,3890 659.57,3875 834.69,3875 846.62,3863.07 1469.15,3863.07 1488.08,3882 3100.36,3882 3104.68,3877.68 3127.32,3877.68 v1(3130,3875) ; v1(380,2960) 380,2901.25 R13_U_low-pass-filter_1.1@382.5,2898.75 423.88,2898.75 497,2825.62 R14_U_low-pass-filter_1.1@497,2818.12
SPI_1_SCK_ISO: J6_U_bob_0.3 J6_U_bob_1.3 J6_U_bob_2.3 J6_U_bob_3.3 J6_U_bob_4.3 U1_U_isolation_0.6 | length 6107.3
  Top Layer w10: J6_U_bob_2.3@2751.54,2240 3046.81,2535.28 3046.81,3622.27 3082.54,3658 3242.85,3658 U1_U_isolation_0.6@3243.35,3657.5
  Bottom Layer w10: J6_U_bob_0.3@661.22,2240 723.52,2302.3 1644.08,2302.3 J6_U_bob_1.3@1706.38,2240 1768.68,2302.3 2689.24,2302.3 J6_U_bob_2.3@2751.54,2240 2816.34,2304.8 3731.89,2304.8 J6_U_bob_3.3@3796.69,2240 3861.49,2304.8 4777.05,2304.8 J6_U_bob_4.3@4841.85,2240
SPI_2_CS0: J1.18 J9.18 | length 933.1
  Top Layer w10: J9.18@1270,2590 1230.03,2629.97 1230.03,3055.79 1270,3095.76 J1.18@1270,3490
SPI_2_CS1: J1.16 J9.16 | length 933.1
  Top Layer w10: J9.16@1170,2590 1209.97,2629.97 1209.97,3055.79 1170,3095.76 J1.16@1170,3490
SPI_2_MISO: J1.22 J9.22 | length 933.1
  Top Layer w10: J9.22@1470,2590 1509.97,2629.97 1509.97,3055.79 1470,3095.76 J1.22@1470,3490
SPI_2_MOSI: J1.37 J9.37 | length 933.1
  Top Layer w10: J9.37@2270,2690 2270,2700.98 2245.81,2725.16 2245.81,3161.54 2230.03,3177.32 2230.03,3506.56 2270,3546.52 J1.37@2270,3590
SPI_2_SCK: J1.13 J9.13 | length 933.1
  Top Layer w10: J9.13@1070,2690 1109.97,2729.97 1109.97,3506.56 1070,3546.52 J1.13@1070,3590
UART_2_CTS: J1.36 J9.36 | length 933.1
  Top Layer w10: J9.36@2170,2590 2130.03,2629.97 2130.03,2724.58 2170,2764.54 J1.36@2170,3490
UART_2_RTS: J1.11 J9.11 | length 933.1
  Top Layer w10: J9.11@970,2690 930.03,2729.97 930.03,3506.56 970,3546.52 J1.11@970,3590
UART_2_RX: J1.10 J3.3 J9.10 UART_RX.1 | length 5472.6
  Top Layer w10: J9.10@870,2590 909.97,2629.97 909.97,3040 870,3079.97 J1.10@870,3490 870,3533.48 920,3583.48 920,3905.32 v1(919.25,3906.07) ; UART_RX.1@4490,3700 4491.87,3698.13 4491.87,3323.61 J3.3@4493.74,3321.74
  Bottom Layer w10: v1(919.25,3906.07) 920.18,3906.07 932.11,3918 4368.67,3918 4490,3796.67 UART_RX.1@4490,3700
UART_2_TX: J1.08 J3.2 J9.08 UART_TX.1 | length 5505.3
  Top Layer w10: J9.08@770,2590 809.97,2629.97 809.97,3055.79 770,3095.76 J1.08@770,3490 770,3533.48 809.97,3573.44 809.97,3869.97 v1(840,3900) ; UART_TX.1@4430,3810 4432.34,3807.66 4432.34,3324.08 J3.2@4434.69,3321.74
  Bottom Layer w10: v1(840,3900) 877.23,3900 896.16,3881.07 941.07,3881.07 950,3890 1470.63,3890 1480.63,3900 4340,3900 UART_TX.1@4430,3810
pads on no net: J2.M1 J2.M2 J5_U_bob_0.MH J5_U_bob_0.MH1 J5_U_bob_0.MH2 J5_U_bob_1.MH J5_U_bob_1.MH1 J5_U_bob_1.MH2 J5_U_bob_2.MH J5_U_bob_2.MH1 J5_U_bob_2.MH2 J5_U_bob_3.MH J5_U_bob_3.MH1 J5_U_bob_3.MH2 J5_U_bob_4.MH J5_U_bob_4.MH1 J5_U_bob_4.MH2

## Polygon pours and split planes (outlines as drawn)
GND on Bottom Layer "NONET_L02_P000" (solid, remove dead copper, shelved, pour order 0): 0,3935 5510,3935 5510,0 0,0
GND on Top Layer "NONET_L01_P001" (solid, remove dead copper, shelved, pour order 1): 0,3935 5510,3935 5510,0 0,0

## Silkscreen, mask and mechanical layers (free items; w line width, h text height)
Bottom Overlay:
  lines w10: 3910,3080 4930,3080 4930,3830 3910,3830 3910,3080
  text "BOBBOB-V1.0 / UBC Thunderbots /  / Designer: / Liam Bontkes /  / November 1, 2021" at 4900,3100 h60
Mechanical 1:
  the board outline again, w10